# Altium PCB ESP32CTRL_AD_PCB.pcbdoc
Units mil, origin at the board's own origin, x right, y up, seen from the top; angles counter-clockwise.
Board outline 3000 x 2260 mil, 2 copper layers (Top Layer, Bottom Layer); 27 components, 21 nets, 140 pads, 34 vias.
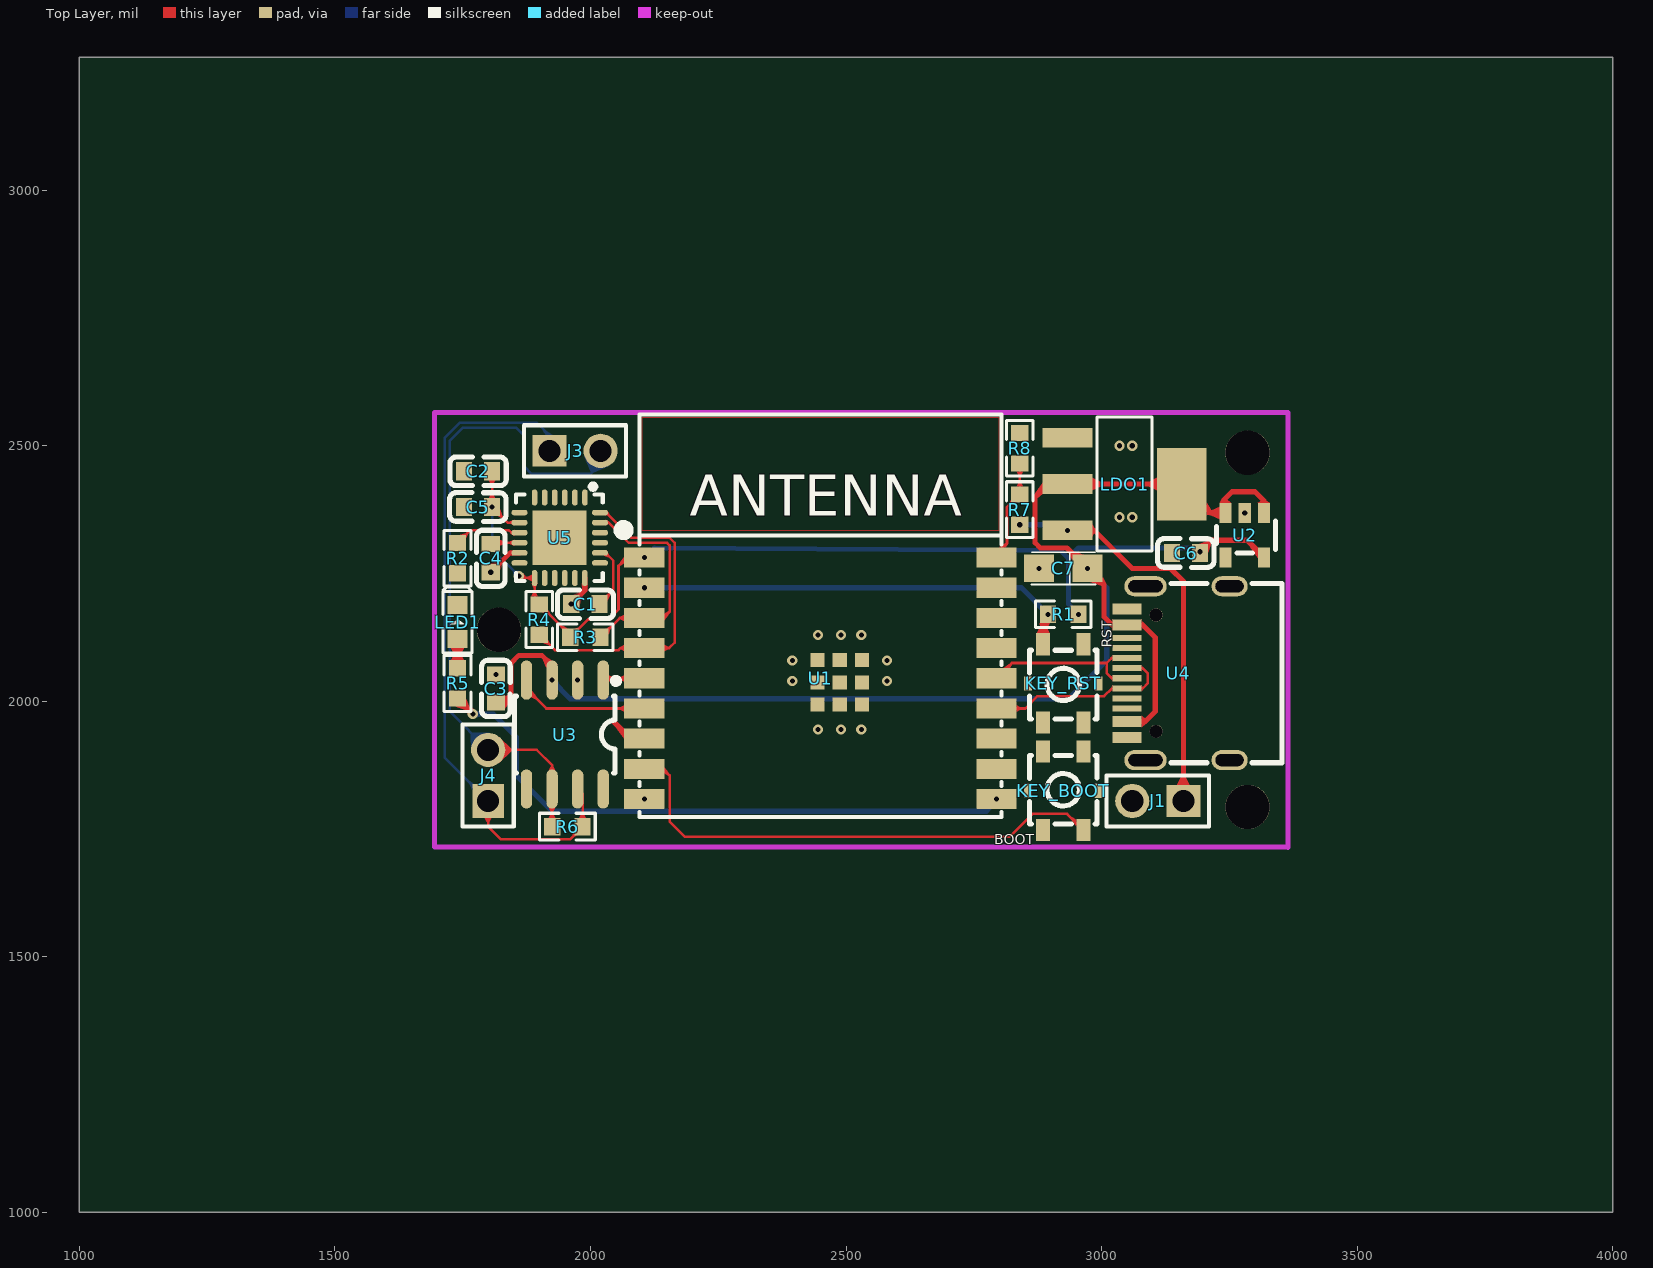
[diagram p0: Top Layer view]
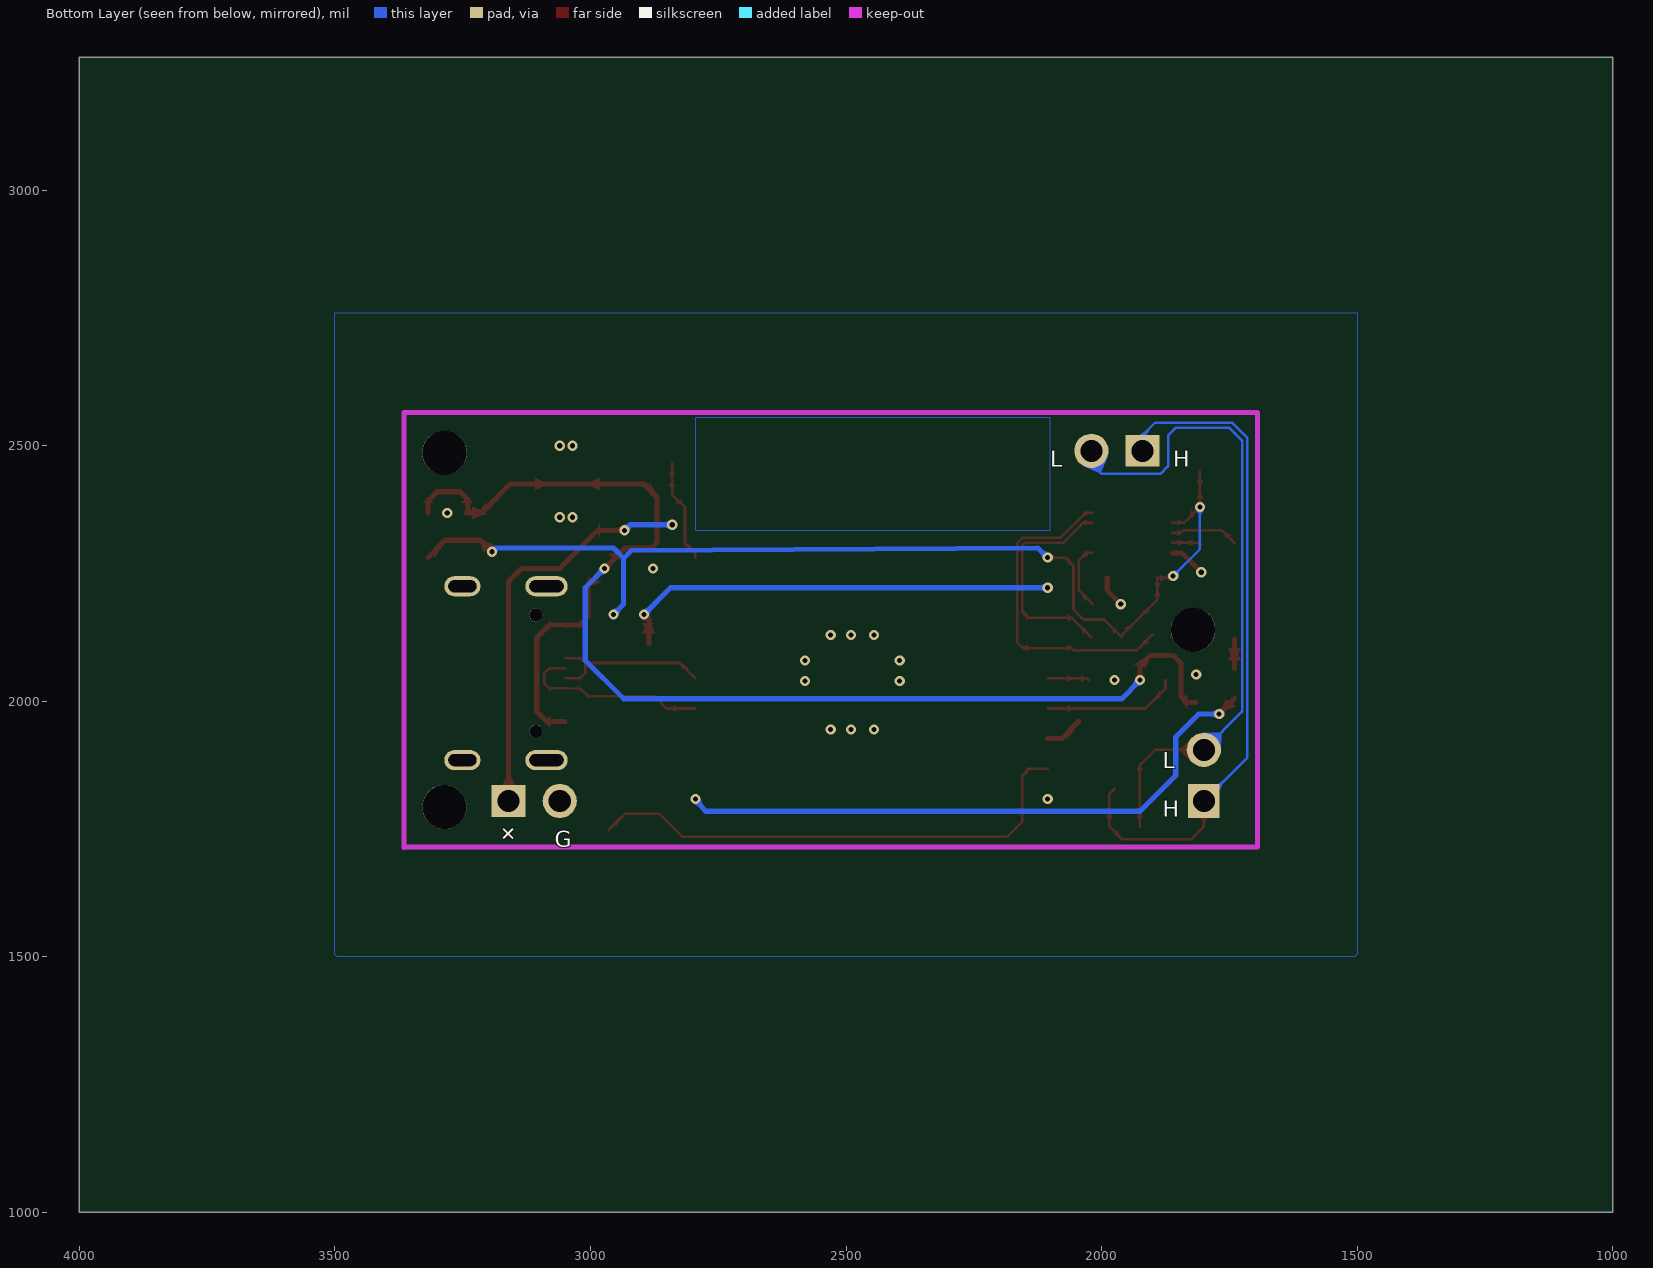
[diagram p1: Bottom Layer view, seen from below]

## Layer stack, top to bottom
Top Layer: signal copper (thickness not stored)
Dielectric: dielectric 12.6, FR-4, Dk 4.8
Bottom Layer: signal copper (thickness not stored)

## Board outline
4000,1000 1000,1000 1000,3260 4000,3260

## Components (designator, comment, footprint, x,y, rotation, side; value= is the part's Value field where it differs from the comment)
C1 "2.2n" C0603 1990,2190 r180 top
C2 "0.1u" C0603 1780,2450 r180 top
C3 "0.1u" C0603 1815,2025 r270 top
C4 "0.1u" C0603 1805,2280 r90 top
C5 "10n" C0603 1780,2380 r0 top
C6 "1u" C0603 3165,2290 r0 top
C7 "10u" CASE-A_3216 2925.05,2260 r180 top
J1 "2.54-2P" HDR-M-2.54_1X2 3110,1805 r180 top
J3 "2.54-2P" HDR-M-2.54_1X2 1970,2490 r0 top
J4 "2.54-2P" HDR-M-2.54_1X2 1800,1855 r90 top
KEY_BOOT "YTSA007A0152501B" SW-SMD_4P-L3.4-W3.4-P2.00-LS4.0_TS3315A160GF 2925,1825 r90 top
KEY_RST "YTSA007A0152501B" SW-SMD_4P-L3.4-W3.4-P2.00-LS4.0_TS3315A160GF 2925,2035 r270 top
LDO1 "SPX1117-5V" SOT-223-4_L6.5-W3.5-P2.30-LS7.0-BR 3045,2425 r180 top
LED1 "LED-0603_R" LED0603_RED 1740,2155 r90 top
R1 "10k" R0603 2925,2170 r180 top
R2 "10k" R0603 1740,2280 r90 top
R3 "1k" R0603 1990,2125 r180 top
R4 "1k" R0603 1900,2160 r90 top
R5 "1k" R0603 1740,2035 r270 top
R6 "120R" R0603 1955,1755 r0 top
R7 "10k" R0603 2840,2375 r90 top
R8 "1k" R0603 2840,2495 r270 top
U1 "ESP32-C3" BULETM-SMD_18P-L20.0-W18.0-P1.50_ESP32-C3-WROOM 2450,2045 r0 top
U2 "SPX3819-3.3" SOT-23-5_L2.9-W1.6-P0.95-LS2.8-BL 3280,2325 r180 top
U3 "TJA1050T" SOIC-8_L5.0-W4.0-P1.27-LS6.0-BL 1950,1935 r180 top
U4 "TYPE_C" USB-C-SMD_TYPE-C16PIN-SHOUHAN 3150,2055 r90 top
U5 "MPU6050" QFN-24_L4.0-W4.0-P0.50-BL-EP2.7 1940,2320 r180 top

## Footprints (in the part's own frame and the unit in brackets; to place one, negate y for a bottom-side part, rotate by r counter-clockwise, add the part's x,y. Pads: shape width x height; smd on the part's side, far side on the other; paste and mask are expansions set on the pad)
BULETM-SMD_18P-L20.0-W18.0-P1.50_ESP32-C3-WROOM [mm]
  rect 2x1 smd paste+0 mask+0.05: 1(-8.75,6) 2(-8.75,4.5) 3(-8.75,3) 4(-8.75,1.5) 5(-8.75,0) 6(-8.75,-1.5) 7(-8.75,-3) 8(-8.75,-4.5) 9(-8.75,-6) 10(8.75,-6) 11(8.75,-4.5) 12(8.75,-3) 13(8.75,-1.5) 14(8.75,0) 15(8.75,1.5) 16(8.75,3) 17(8.75,4.5) 18(8.75,6)
  rect 0.7x0.7 smd paste+0 mask+0.05: 19(-0.14,-1.3) 19(-0.14,-0.2) 19(-0.14,0.9) 19(0.96,-1.3) 19(0.96,-0.2) 19(0.96,0.9) 19(2.06,-1.3) 19(2.06,-0.2) 19(2.06,0.9)
  silkscreen extent -10.03,-6.9 9,13.1
C0603 [mm]
  rect 0.8x0.9 smd paste+0 mask+0.051: 1(-0.7,0) 2(0.7,0)
  silkscreen extent -1.41,-0.71 1.39,0.72
CASE-A_3216 [mm]
  rect 1.5x1.359 smd paste+0 mask+0.051: 1(-1.2,0) 2(1.2,0)
  silkscreen extent -1.6,-0.8 1.6,0.8
HDR-M-2.54_1X2 [mm]
  rect 1.7x1.575 hole 1.1 paste+0 mask+0.051: 1(-1.27,0)
  round 1.7 hole 1.1 paste+0 mask+0.051: 2(1.27,0)
  silkscreen extent -2.54,-1.27 2.54,1.27
LED0603_RED [mm]
  rect 0.9x1 smd paste+0 mask+0.051: 1(-0.85,0) 2(0.85,0)
  silkscreen extent -1.54,-0.73 1.75,0.73
QFN-24_L4.0-W4.0-P0.50-BL-EP2.7 [mm]
  oval 0.28x0.8 smd paste-100 mask+0.05: 1(-1.25,-2) 2(-0.75,-2) 3(-0.25,-2) 4(0.25,-2) 5(0.75,-2) 6(1.25,-2) 13(1.25,2) 14(0.75,2) 15(0.25,2) 16(-0.25,2) 17(-0.75,2) 18(-1.242,2)
  oval 0.8x0.28 smd paste-100 mask+0.05: 7(2,-1.25) 8(2,-0.75) 9(2,-0.25) 10(2,0.25) 11(2,0.75) 12(2,1.25) 19(-2,1.25) 20(-2,0.75) 21(-2,0.25) 22(-2,-0.25) 23(-2,-0.75) 24(-2,-1.25)
  rect 2.7x2.7 smd paste-100 mask+0.05: 25(0.012,0)
  silkscreen extent -2.14,-2.79 2.16,2.15
R0603 [mil]
  rect 31.75x34.02 smd paste-3937.01 mask+2: 1(-29.66,0) 2(29.66,0)
  silkscreen extent -55,-26 55,26
SOIC-8_L5.0-W4.0-P1.27-LS6.0-BL [mil]
  oval 22.38x76.78 smd paste+0 mask+2: 1(-75,-106.5) 2(-25,-106.5) 3(25,-106.5) 4(75,-106.5) 5(75,106.5) 6(25,106.5) 7(-25,106.5) 8(-75,106.5)
  silkscreen extent -106,-111 98,75
SOT-23-5_L2.9-W1.6-P0.95-LS2.8-BL [mm]
  rect 0.6x1 smd paste+0 mask+0.05: 1(-0.95,-1.1) 2(0,-1.1) 3(0.95,-1.1) 4(0.95,1.1) 5(-0.95,1.1)
  silkscreen extent -1.52,-0.7 1.4,0.89
SOT-223-4_L6.5-W3.5-P2.30-LS7.0-BR [mm]
  rect 2.47x0.98 smd paste+0 mask+0.051: 1(2.835,-2.3) 2(2.835,0) 3(2.835,2.3)
  rect 2.47x3.6 smd paste+0 mask+0.051: 4(-2.835,0)
  silkscreen extent -1.37,-3.33 1.37,3.33
SW-SMD_4P-L3.4-W3.4-P2.00-LS4.0_TS3315A160GF [mm]
  rect 1.1x0.7 smd paste+0 mask+0.051: 1(-1.95,1) 2(1.95,1) 3(-1.95,-1) 4(1.95,-1)
  rect 0.7x0.4 smd paste+0 mask+0.051: 5(0,1.755) 5(0,-1.755)
  silkscreen extent -1.65,-1.67 1.76,1.68
USB-C-SMD_TYPE-C16PIN-SHOUHAN [mm]
  oval 1x2.1 hole 0.6 slot 1.7 at 90 deg paste+0 mask+0.051: 1(-4.32,1.63) 2(4.32,1.63)
  oval 1x1.8 hole 0.6 slot 1.4 at 90 deg paste+0 mask+0.051: 3(-4.32,-2.55) 4(4.32,-2.55)
  rect 0.55x1.45 smd paste-100 mask+0.051: A1B12(-3.2,2.55) A4B9(-2.4,2.55) B1A12(3.2,2.55) B4A9(2.4,2.55)
  rect 0.3x1.45 smd paste-100 mask+0.051: A5(-1.25,2.55) A6(-0.25,2.55) A7(0.25,2.55) A8(1.25,2.55) B5(1.75,2.55) B6(0.75,2.55) B7(-0.75,2.55) B8(-1.75,2.55)
  round 0.65 hole 0.65 unplated paste+0: ""(-2.89,1.1) ""(2.89,1.1)
  silkscreen extent -4.45,-5.15 4.45,0.36

## Free pads (board coordinates)
  round 86.61 hole 86.61 unplated paste+0: ""(1820.98,2139.8) ""(3285.55,1793.35) ""(3285.55,2486.26)

## Via types
v1: diameter 20, hole 10, Top Layer to Bottom Layer, tented both sides, 34 vias

## Nets (pads, with @x,y where several pads share a name; then routed paths per layer and width w, separated by ;. In a path a pad name is that pad's centre, name@x,y a point inside that pad or via, vN(x,y) a via of type N, cw(c..) or ccw(c..) an arc to the next point about the centre after c; other vN are vias at no path point)
3V3: C2.1 C5.2 C6.2 R1.1 R3.2 R4.2 U1.1 U2.5 U5.8 U5.13 | length 2110.9
  Top Layer w5: C2.1 v1(1807.56,2380) 1838,2349.5 U5.8 ; v1(1860,2245) 1863.7,2241.3 U5.13 1890.8,2198.9 R4.2 1960.3,2129.3 R3.2 1995.3,2160 2035,2160 2055,2180 2055,2265 2071.2,2281.2 v1(2105.5,2281.2)
  Top Layer w10: C6.2 v1(3192.56,2292.56) 3215,2315 3284.1,2315 U2.5
  Bottom Layer w5: v1(1807.56,2380) 1807.56,2297.44 v1(1860,2245)
  Bottom Layer w10: v1(2105.5,2281.2) 2125,2300 2920,2295 2935,2280 ; v1(2954.66,2170) 2935,2190 2935,2280 ; v1(3192.56,2292.56) 3185.1,2300 2955,2300 2935,2280
5V0: C3.2 C7.1 LDO1.2 LDO1.4 U2.1 U2.3 U3.3 U4.A4B9 U4.B4A9 | length 2746.6
  Top Layer w10: C3.2 1832.4,1997.4 1845,2010 1845,2075 1860,2090 1905,2090 1925,2070 v1(1925,2041.5) ; U4.A4B9 3085.5,1960.5 3105,1980 3105,2125 3080,2150 U4.B4A9 3020.5,2149.5 3005,2165 3005,2227.2 v1(2972.24,2260) 2932.2,2300 2880,2300 2870,2310 2870,2400 2895,2425 LDO1.2 LDO1.4 3213.3,2368.3 U2.3 3240,2370.9 3240,2395 3255,2410 3300,2410 3317.4,2392.6 U2.1
  Bottom Layer w10: v1(1925,2041.5) 1960,2005 2935,2005 3010,2080 3010,2222.2 v1(2972.24,2260)
ADC: R7.2 R8.2 U1.18 | length 202.9
  Top Layer w5: U1.18 2794.5,2289.5 2815,2310 2815,2379.7 R7.2 R8.2
BOOT: KEY_BOOT.3 U1.8 | length 998.4
  Top Layer w5: U1.8 2142.2,1867.8 2155,1855 2155,1765 2185,1735 2820,1735 2865,1780 2932.6,1780 KEY_BOOT.3
CAN_RX: U1.6 U3.4 | length 263.2
  Top Layer w5: U3.4 1875,2025 1914,1986 U1.6@2105.5,1986
CAN_TX: U1.5 U3.1 | length 81.9
  Top Layer w5: U3.1 2028.5,2045 U1.5
CANH: J3.1 J4.1 R6.2 U3.7 | length 1335.9
  Top Layer w5: J4.1 1800,1755 1825,1730 1959.7,1730 R6.2 1984.7,1818.8 U3.7
  Bottom Layer w5: J4.1 1715,1890 1715,2515 1745,2545 1895,2545 1920,2520 J3.1
CANL: J3.2 J4.2 R6.1 U3.6 | length 1304.6
  Top Layer w5: J4.2 1895,1905 1925,1875 U3.6 R6.1
  Bottom Layer w5: J4.2 1725,1980 1725,2510 1750,2535 1855,2535 1870,2520 1870,2460 1885,2445 2000,2445 2020,2465 J3.2
EN: KEY_RST.3 R1.2 U1.2 | length 873.7
  Top Layer w10: KEY_RST.3 2885.6,2160.3 v1(2895.34,2170)
  Bottom Layer w10: v1(2105.51,2222.17) 2843.17,2222.17 v1(2895.34,2170)
GND: C1.2 C2.2 C3.1 C4.1 C5.1 C6.1 C7.2 J1.2 KEY_BOOT.2 KEY_RST.2 LDO1.1 LED1.2 R2.1 R8.1 U1.9 U1.19 U2.2 U3.2 U3.8 U4.1 U4.2 U4.3 U4.4 U4.A1B12 U4.B1A12 U5.1 U5.11 U5.18 U5.25 | length 134.4
  Top Layer w10: v1(1805,2252.44) 1843,2290.5 U5.11 ; v1(1962.44,2190) 1988.9,2216.5 U5.18
  other v1: 2105.51,1808.78 2445,1945 2490,1945 2530,1945 2395,2040 2580,2040 1975,2041.5 1815,2052.56 2395,2080 2580,2080 2445,2130 2490,2130 2530,2130 2877.81,2260 3035,2360 3060,2360 3280,2368.31 3035,2500 3060,2500
I2C_SCL: R3.1 U1.3 U5.23 | length 440.7
  Top Layer w5: U5.23 2035.5,2349.5 2075,2310 2150,2310 2155,2305 2155,2175 2143.1,2163.1 U1.3 2057.8,2163.1 R3.1
I2C_SDA: R4.1 U1.4 U5.24 | length 649.6
  Top Layer w5: R4.1 1930.3,2100 2055,2100 2059.1,2104.1 U1.4 2154.1,2104.1 2165,2115 2165,2310 2155,2320 2080,2320 2030.8,2369.2 U5.24
LED: R5.2 U1.10 | length 1201
  Top Layer w10: R5.2 v1(1770,1975)
  Bottom Layer w10: v1(1770,1975) 1810,1975 1855,1930 1855,1855 1925,1785 2775,1785 v1(2794.49,1808.78)
R5_1: LED1.1 R5.1 | length 56.8
  Top Layer w10: R5.1 LED1.1
S$1126: 
U5_9: R2.2 U5.9 | length 133.9
  Top Layer w5: R2.2 1765.3,2335 1840,2335 1845.2,2329.8 U5.9
U5_10: C4.2 U5.10 | length 57.4
  Top Layer w5: C4.2 1807.6,2310.2 U5.10
U5_20: C1.1 U5.20 | length 129.1
  Top Layer w5: C1.1 2045,2217.4 2045,2275 2029.5,2290.5 U5.20
USB+: U1.14 U4.A6 U4.B6 | length 335.1
  Top Layer w5: U1.14 2824.5,2075 3010,2075 ; U4.A6 3019.8,2045.2 3010,2055 3010,2075 ; U4.B6 3019.5,2084.5 3015,2080 3010,2075
USB-: U1.13 U4.A7 U4.B7 | length 380.1
  Top Layer w5: U1.13@2794.5,1986 2851,1986 2875,2010 3005,2010 3020,2025 U4.B7 3080.5,2025.5 3090,2035 3090,2055 3080,2065 U4.A7
VCC: J1.1 LDO1.3 R7.1 | length 795.7
  Top Layer w10: v1(2933.4,2334.5) 2985.6,2334.5 3060,2260 3135,2260 3160,2235 J1.1
  Bottom Layer w10: v1(2840,2345.34) 2922.56,2345.34 v1(2933.4,2334.5)
pads on no net: KEY_BOOT.1 KEY_BOOT.4 KEY_BOOT.5 KEY_RST.1 KEY_RST.4 KEY_RST.5 U1.7 U1.11 U1.12 U1.15 U1.16 U1.17 U2.4 U3.5 U4. U4.A5 U4.A8 U4.B5 U4.B8 U5.2 U5.3 U5.4 U5.5 U5.6 U5.7 U5.12 U5.14 U5.15 U5.16 U5.17 U5.19 U5.21 U5.22
copper on no net: | length 74.2
  Top Layer w10: 2045,1960 2078.1,1926.9 2105.5,1926.9

## Polygon pours and split planes (outlines as drawn)
VCC on Bottom Layer (solid): 2100,2335 2100,2555 2795,2555 2795,2335 2100,2335
GND on Bottom Layer (solid): 1500,2760 1500,1505 1505,1500 3495,1500 3500,1505 3500,2760
VCC on Top Layer (solid): 2100,2555 2100,2335 2800,2335 2800,2555
GND on Top Layer (solid): 1595,2665 1595,1665 1595,1605 3400,1605 3400,2660

## Other copper
Top Layer:
  region net CANL: 1822.13,1879.9 1822.13,1930.1 1845.56,1907.5 1845.56,1902.5
  region net 3V3: 1815.08,2386.59 1800.08,2386.64 1805.1,2393.62 1810.1,2393.61
  region net 3V3: 1817.54,2380.63 1806.94,2370.02 1815.42,2368.61 1818.96,2372.15
  region net 3V3: 1868.4,2250.42 1864.33,2235.98 1872.4,2238.8 1873.81,2243.8
  region net 3V3: 3202.54,2291.93 3191.93,2302.54 3198.65,2305.72 3205.72,2298.65
  region net 3V3: 2098.89,2273.7 2098.89,2288.7 2091.89,2283.7 2091.89,2278.7
  region net EN: 2895.95,2160.02 2885.36,2170.65 2882.17,2163.94 2889.22,2156.85
  region net 5V0: 1917.5,2048.11 1932.5,2048.11 1930,2055.11 1920,2055.11
  region net 5V0: 2972.85,2269.98 2962.26,2259.35 2959.07,2266.06 2966.12,2273.15
  region net 5V0: 2982.22,2260.61 2971.59,2250.02 2978.31,2246.83 2985.39,2253.88
  region net LED: 1770.68,1984.98 1760.02,1974.42 1756.87,1981.16 1763.97,1988.19
  region net VCC: 2940.01,2327 2940.01,2342 2947.01,2339.5 2947.01,2329.5
  region net ADC: 2834.1,2388.78 2822.99,2394.52 2819.62,2387.82 2824.28,2385.41
  region net ADC: 2833.75,2420.53 2846.25,2420.53 2842.5,2428.03 2837.5,2428.03
  region net ADC: 2846.25,2449.47 2833.75,2449.47 2837.5,2441.97 2842.5,2441.97
  region net U5_20: 2029.99,2207.72 2033.31,2195.67 2038,2206.87 2036.48,2212.41
  region net 3V3: 1813.85,2432.28 1801.35,2432.28 1805.1,2424.78 1810.1,2424.78
  region net 5V0: 1832.72,2010.22 1832.72,1985.22 1845,2002.93 1841.46,2013.54
  region net U5_10: 1822.72,2316.45 1822.72,2303.95 1830.22,2307.7 1830.22,2312.7
  region net 3V3: 1801.35,2397.72 1813.85,2397.72 1810.1,2405.22 1805.1,2405.22
  region net 3V3: 1823.31,2374.3 1819.86,2362.28 1826.34,2357.66 1827.91,2363.16
  region net 3V3: 3189.22,2307.72 3208.31,2291.57 3213.71,2306.64 3206.05,2313.12
  region net 5V0: 2942.76,2276.51 2965.57,2286.75 2945.22,2294.05 2935.46,2289.67
  region net 5V0: 3001.82,2242.98 2978.79,2233.25 2999.44,2225.69 3009.38,2229.89
  region net EN: 2898.1,2152.99 2879.47,2152.99 2880.6,2137.99 2890.6,2137.99
  region net U5_9: 1745.83,2325.53 1757.01,2319.93 1760.44,2326.6 1755.73,2328.96
  region net 3V3: 1944.47,2141.28 1956.95,2142.01 1944.38,2148.79 1937.7,2148.4
  region net 3V3: 1970.37,2142.01 1976.22,2130.96 1979.54,2140.71 1977.09,2145.33
  region net I2C_SCL: 2029.93,2142.01 2035.53,2130.83 2038.96,2140.73 2036.6,2145.44
  region net 3V3: 1917.01,2179.56 1905.92,2173.78 1915.71,2170.43 1920.36,2172.85
  region net 3V3: 1884.55,2205.53 1897.05,2205.53 1893.3,2213.03 1888.3,2213.03
  region net I2C_SDA: 1917.01,2120.07 1905.83,2114.47 1915.73,2111.04 1920.44,2113.4
  region net LED: 1757.01,2003.64 1736.41,1989.47 1754.41,1983.64 1762.78,1989.4
  region net R5_1: 1752.5,2080.53 1727.5,2080.53 1735,2095.53 1745,2095.53
  region net CANH: 1978.45,1772.01 1990.95,1772.01 1987.2,1779.51 1982.2,1779.51
  region net CANH: 1974.63,1737.99 1968.78,1749.04 1965.46,1739.29 1967.91,1734.67
  region net CANL: 1931.48,1772.01 1918.98,1772.01 1922.7,1779.51 1927.7,1779.51
  region net BOOT: 2950.59,1755.76 2950.59,1768.26 2943.09,1773.05 2943.09,1765.98
  region net EN: 2873.1,2133.42 2898.1,2133.42 2890.6,2148.42 2880.6,2148.42
  region net 5V0: 2884.77,2427.27 2884.77,2405.71 2873.54,2396.46 2870,2407.07
  region net 5V0: 2982.01,2412.5 2982.01,2437.5 2997.01,2430 2997.01,2420
  region net VCC: 2982.01,2322 2982.01,2347 2985.6,2339.5 2985.6,2329.5
  region net 5V0: 3107.99,2412.5 3107.99,2437.5 3092.99,2430 3092.99,2420
  region net 5V0: 3205.23,2388.87 3205.23,2363.87 3209.77,2364.77 3213.3,2375.37
  region net ADC: 2799.66,2300.91 2812.16,2300.91 2816.94,2308.41 2809.87,2308.41
  region net USB+: 2807.94,2064.69 2820.44,2064.69 2825.22,2072.19 2818.15,2072.19
  region net USB-: 2833.86,1992.25 2833.86,1979.75 2841.36,1983.5 2841.36,1988.5
  region net BOOT: 2144.88,1871.37 2144.88,1858.87 2152.38,1854.08 2152.38,1861.16
  region: 2066.14,1926.36 2066.14,1946.57 2051.14,1960.93 2051.14,1946.79
  region net CAN_RX: 2066.14,1979.75 2066.14,1992.25 2058.64,1988.5 2058.64,1983.5
  region net CAN_TX: 2066.14,2038.75 2066.14,2051.25 2058.64,2047.5 2058.64,2042.5
  region net I2C_SDA: 2066.14,2097.85 2066.14,2110.35 2059.1,2106.6 2059.1,2101.6
  region net I2C_SDA: 2144.88,2110.35 2144.88,2097.85 2152.38,2101.6 2152.38,2106.6
  region net I2C_SCL: 2066.14,2156.85 2066.14,2169.35 2058.64,2165.6 2058.64,2160.6
  region net I2C_SCL: 2144.88,2171.13 2144.88,2158.63 2152.38,2168.84 2152.38,2175.92
  region net 3V3: 2066.14,2269.89 2066.14,2282.39 2058.64,2272.18 2058.64,2265.1
  region net 3V3: 3305.59,2281.01 3305.59,2301.38 3290.59,2315.58 3290.59,2301.44
  region net 5V0: 3305.59,2388 3329.21,2388 3322.4,2392.6 3312.4,2392.6
  region net 5V0: 3230.79,2355.8 3230.79,2380.8 3215.79,2373.3 3215.79,2363.3
  region net 5V0: 3230.79,2388 3252.5,2388 3245,2395 3235,2395
  region net USB-: 3078.14,2031.38 3078.14,2019.57 3080.5,2023 3080.5,2028
  region net USB-: 3021.05,2019.57 3021.05,2031.27 3020,2027.5 3020.04,2022.5
  region net USB+: 3021.05,2039.26 3021.05,2051.07 3019.8,2047.7 3019.8,2042.7
  region net USB-: 3078.14,2070.75 3078.14,2058.94 3080,2062.5 3079.98,2067.5
  region net USB+: 3021.05,2078.63 3021.05,2090.44 3019.5,2087 3019.5,2082
  region net 5V0: 3078.14,2160.32 3078.14,2138.66 3080,2145 3079.92,2155
  region net 5V0: 3021.05,2138.66 3021.05,2160.32 3020.5,2154.5 3020.5,2144.5
  region net 5V0: 3078.14,1971.34 3078.14,1949.68 3085.5,1955.5 3085.5,1965.5
  region net VCC: 3147.5,1836 3172.5,1836 3165,1851 3155,1851
  region net CANH: 1806.25,1771.54 1793.75,1771.54 1797.5,1764.04 1802.5,1764.04
  region net R5_1: 1752.5,2103.82 1727.5,2103.82 1735,2088.82 1745,2088.82
  region net CAN_TX: 2036.19,2051.25 2036.19,2038.75 2043.69,2042.5 2043.69,2047.5
  region net 5V0: 1913.81,2065.7 1935.81,2071.6 1916.38,2085.69 1908.01,2079.92
  region net CAN_RX: 1886.19,2020.06 1884.07,2007.74 1893.69,2002.78 1893.69,2009.85
  region net CANL: 1931.35,1792.09 1918.85,1791.95 1922.68,1784.49 1927.68,1784.55
  region net CANL: 1931.25,1864.98 1918.75,1864.98 1922.5,1872.48 1927.5,1872.48
  region net 3V3: 1851.04,2344.02 1851,2355.04 1843.51,2352 1843.53,2347
  region net U5_9: 1851.06,2324.33 1850.99,2335.35 1845.18,2332.3 1845.22,2327.3
  region net U5_10: 1851.05,2315.67 1850.99,2304.65 1843.51,2307.7 1843.54,2312.7
  region net 3V3: 1896.3,2231.03 1885.28,2231.02 1888.3,2223.52 1893.3,2223.53
  region net 3V3: 1885.28,2235.05 1885.28,2247.55 1877.78,2243.8 1877.78,2238.8
  region net U5_20: 2030.74,2295.69 2027.12,2284.96 2034.34,2282.13 2037.32,2286.21
  region net I2C_SCL: 2029,2355.04 2028.95,2344.02 2035.49,2347 2035.51,2352
  region net I2C_SDA: 2032.15,2373.72 2025.8,2364.7 2033.65,2362.82 2036.57,2366.97
Bottom Layer:
  region net CANL: 2034.89,2460.03 1988.4,2478.97 2000.3,2448.83 2005.32,2446.78
  region net CANL: 1766.6,1902.9 1802.1,1938.4 1769.55,1938.98 1766.02,1935.45
  region net 3V3: 1800.06,2373.39 1815.06,2373.39 1810.06,2366.39 1805.06,2366.39
  region net 3V3: 1860.63,2254.98 1850.02,2244.37 1848.61,2252.86 1852.14,2256.39
  region net 3V3: 3193.17,2302.54 3182.58,2291.92 3181.57,2296.46 3188.63,2303.54
  region net 3V3: 2955.38,2179.97 2944.67,2169.47 2941.56,2176.22 2948.7,2183.22
  region net 3V3: 2115.47,2280.39 2105.06,2291.19 2111.83,2294.25 2118.77,2287.05
  region net EN: 2112.12,2214.67 2112.12,2229.67 2119.12,2227.17 2119.12,2217.17
  region net EN: 2895.97,2179.98 2885.36,2169.37 2882.18,2176.09 2889.25,2183.16
  region net 5V0: 1934.99,2041.92 1924.16,2031.53 1930.81,2028.21 1938.03,2035.13
  region net 5V0: 2982.22,2260.61 2971.59,2250.02 2978.31,2246.83 2985.39,2253.88
  region net LED: 1776.61,1967.5 1776.61,1982.5 1783.61,1980 1783.61,1970
  region net LED: 2796.1,1798.91 2784.5,1808.42 2781.99,1801.42 2789.73,1795.08
  region net VCC: 2846.61,2337.84 2846.61,2352.84 2853.61,2350.34 2853.61,2340.34
  region net VCC: 2934.02,2344.48 2923.42,2333.87 2920.24,2340.59 2927.31,2347.66
  region net CANH: 1912.75,2521 1925.25,2521 1915.03,2528.5 1907.96,2528.5
  region net CANH: 1769,1826.16 1771.2,1838.46 1764.56,1843.97 1763.49,1837.97

## Silkscreen, mask and mechanical layers (free items; w line width, h text height)
Top Overlay:
  text "RST" at 3019.84,2105 h19.68 r90
  text "BOOT" at 2790,1720.16 h19.68
Bottom Overlay:
  text "H" at 1860,2459.25 h31.5
  text "L" at 2100,2459.25 h31.5
  text "L" at 1880,1869.25 h31.5
  text "H" at 1880,1774.25 h31.5
  text "+" at 3163.86,1718.86 h31.5 r315
  text "G" at 3070,1714.25 h31.5

## Text inside footprints (layer, text, board x,y; h text height)
U1: Top Overlay "ANTENNA" at 2194.09,2363.27 h80